# Altium PCB PCB2.PcbDoc
Units mil, origin at the board's own origin, x right, y up, seen from the top; angles counter-clockwise.
Board outline 1730 x 1050 mil, 2 copper layers (Top Layer, Bottom Layer); 18 components, 25 nets, 102 pads, 23 vias.
Unrouted connection lines stored in the file: 1.
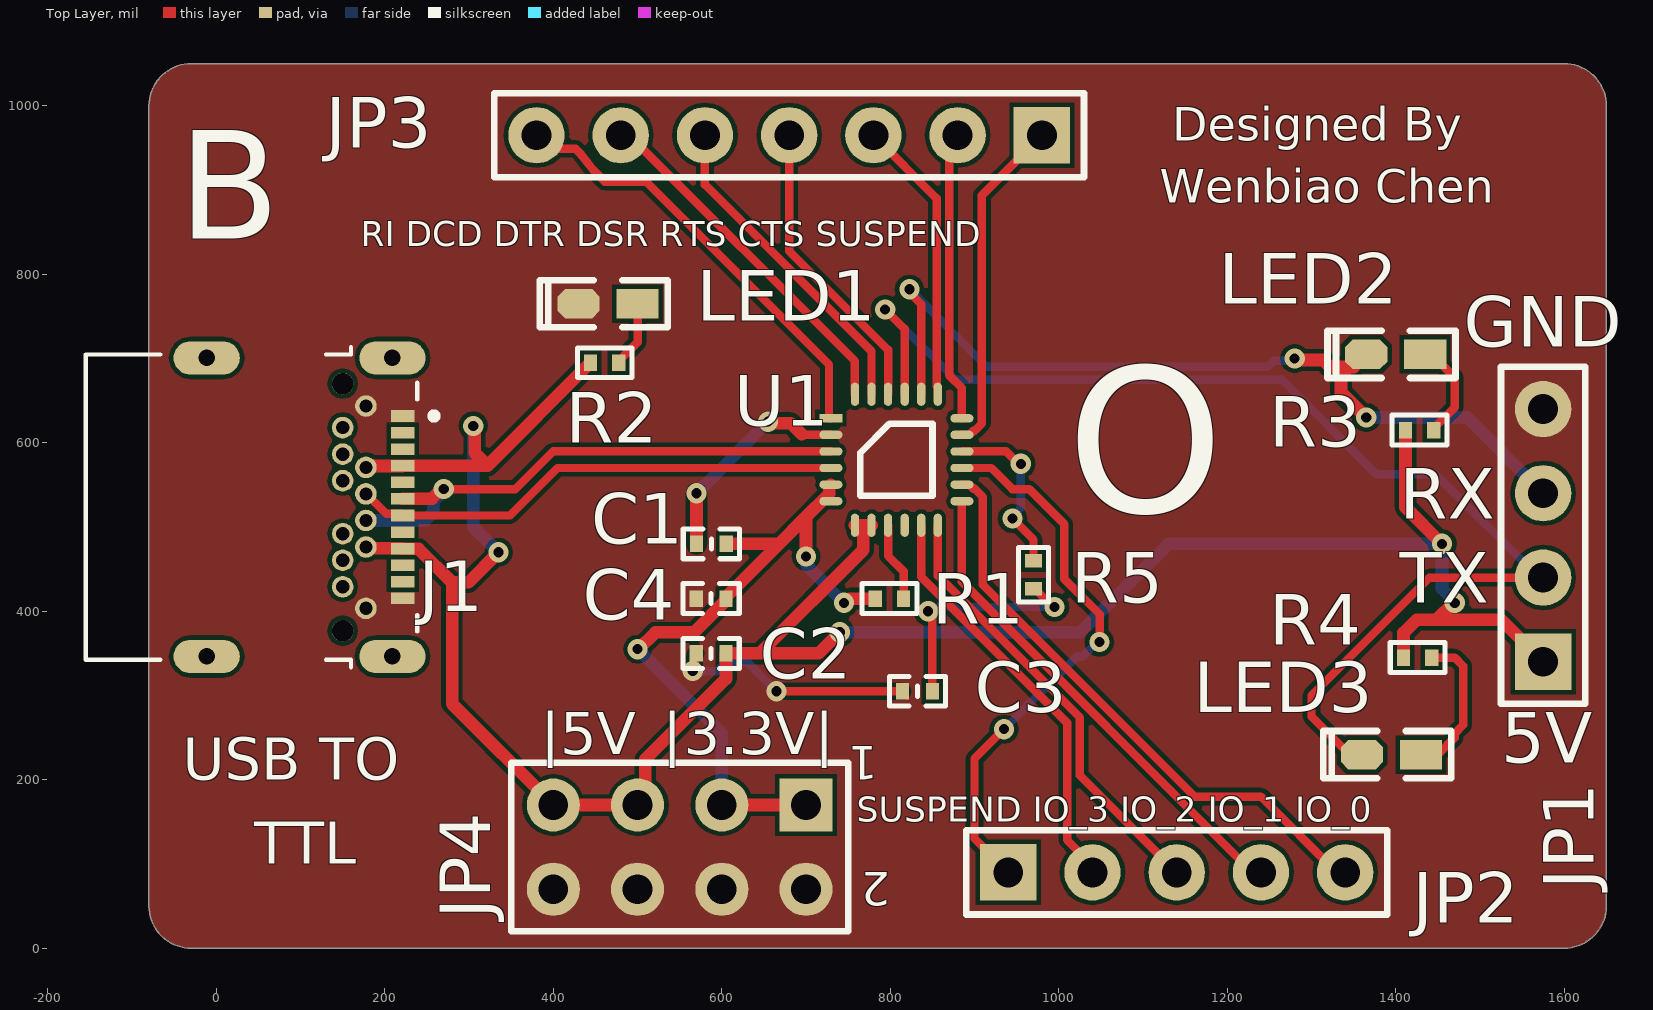
[diagram p0: Top Layer view]
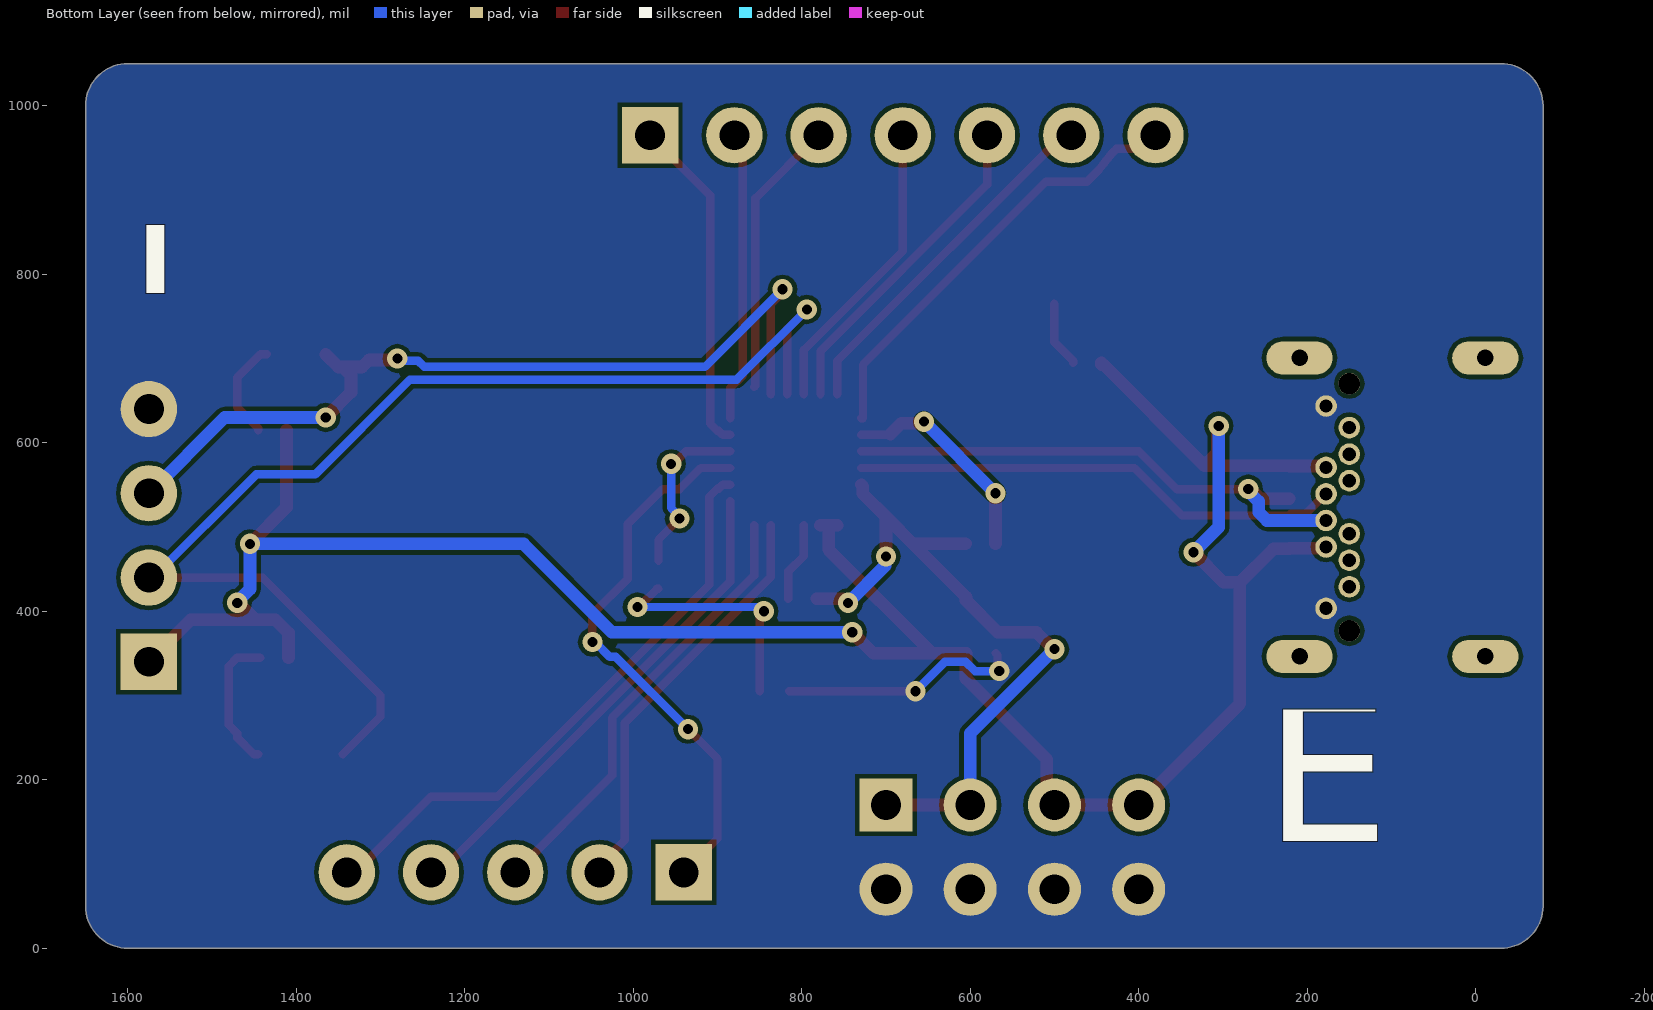
[diagram p1: Bottom Layer view, seen from below]

## Layer stack, top to bottom
Top Solder: solder mask 0.4, Solder Resist, Dk 3.5
Top Layer: signal copper 1.4
Dielectric 1: dielectric 12.6, FR-4, Dk 4.8
Bottom Layer: signal copper 1.4
Bottom Solder: solder mask 0.4, Solder Resist, Dk 3.5

## Board outline
-80,50 -80,1000 cw(c-30,1000) -30,1050 1600,1050 cw(c1600,1000) 1650,1000 1650,50 cw(c1600,50) 1600,0 -30,0 cw(c-30,50)

## Design rules (kind name [scope] priority, off if disabled: settings)
Clearance [All] p1: gap=5 ignorepadtopadclearanceinfootprint=TRUE
MinimumSolderMaskSliver [All] p1: minsoldermaskwidth=0
PolygonConnect [All] p1: connectstyle=Direct reliefconductorwidth=10 reliefentries=4 polygonreliefangle="90 Angle" airgapwidth=10
RoutingVias [All] p1: holewidth=28 width=50 viastyle="Through Hole" minholewidth=12 minwidth=24 maxholewidth=28 maxwidth=50
SilkToSilkClearance [All] p1: silktosilkclearance=0
SilkToSolderMaskClearance [IsPad] p1: minsilkscreentomaskgap=0 clearancetoexposedcopper=TRUE
SolderMaskExpansion [All] p1: expansion=4 istentingtop=FALSE
Width [All] p1: maxlimit=15 minlimit=10 preferedwidth=10
27 further rules are at their usual default settings.

## Components (designator, comment, footprint, x,y, rotation, side; value= is the part's Value field where it differs from the comment)
C1 "104" "C 0402_L" 587.71,480 r180 top
C2 "104" "C 0402_L" 587.28,350 r180 top
C3 "104" "C 0402_L" 832.29,305 r0 top
C4 "104" "C 0402_L" 587.28,415 r180 top
J1 "USB_Type-C" Type_C-UJ31-CH-G2-SMT-TR(Primary) 221.26,631.77 r270 top
JP1 "HDR-1X4" HDR2.54-LI-4P 1575,490 r90 top
JP2 "HDR-1X5" HDR2.54-LI-5P 1140,90 r0 top
JP3 "HDR-1X7" HDR2.54-LI-7P 680,965 r180 top
JP4 "Header 4X2" HDR2.54-LI-2x4P 550,120 r180 top
LED1 "红色" "LED 0603B" 465,765.26 r180 top
LED2 "红色" "LED 0603Y" 1400,705 r180 top
LED3 "红色" "LED 0603G" 1395,230 r180 top
R1 "1K" "R 0402_L" 800,415 r180 top
R2 "1K" "R 0402_L" 460,695 r0 top
R3 "1K" "R 0402_L" 1427.29,615 r0 top
R4 "1K" "R 0402_L" 1425,345 r0 top
R5 "1K" "R 0402_L" 970,444.25 r270 top
U1 "CP2104" CP2104 729.49,629.06 r0 top

## Footprints (in the part's own frame and the unit in brackets; to place one, negate y for a bottom-side part, rotate by r counter-clockwise, add the part's x,y. Pads: shape width x height; smd on the part's side, far side on the other; paste and mask are expansions set on the pad)
"C 0402_L" [mm] "无极性贴片电容         淘宝ID:黄晶宝石"
  rect 0.4x0.5 smd: 1(-0.45,0) 2(0.45,0)
  silkscreen extent -0.85,-0.45 0.85,0.45, body extent -0.5,-0.26 0.5,0.26, height 0.53
CP2104 [mm]
  rect 0.7x0.25 smd: 1(0,0)
  oval 0.7x0.25 smd: 2(0,-0.5) 3(0,-1) 4(0,-1.5) 5(0,-2) 6(0,-2.5) 13(3.95,-2.5) 14(3.95,-2) 15(3.95,-1.5) 16(3.95,-1) 17(3.95,-0.5) 18(3.95,0)
  oval 0.25x0.7 smd: 7(0.725,-3.225) 8(1.225,-3.225) 9(1.725,-3.225) 10(2.225,-3.225) 11(2.725,-3.225) 12(3.225,-3.225) 19(3.225,0.725) 20(2.725,0.725) 21(2.225,0.725) 22(1.725,0.725) 23(1.225,0.725) 24(0.725,0.725)
  silkscreen extent 0.88,-2.34 3.06,-0.16, body extent -0.05,-3.25 4.05,0.85, height 0.8
HDR2.54-LI-2x4P [mm] "双排排针，4x2脚 淘宝ID:黄晶宝石   店铺网址:https://shop463601444.taobao.com"
  rect 1.6x1.6 hole 0.9: 1(-3.81,-1.27)
  round 1.6 hole 0.9: 2(-3.81,1.27) 3(-1.27,-1.27) 4(-1.27,1.27) 5(1.27,-1.27) 6(1.27,1.27) 7(3.81,-1.27) 8(3.81,1.27)
  silkscreen extent -5.08,-2.54 5.08,2.54, body extent -5.08,-2.54 5.08,2.54, height 8.5
HDR2.54-LI-4P [mm] "排针，4脚"
  rect 1.7x1.7 hole 0.9: 1(-3.81,0)
  round 1.7 hole 0.9: 2(-1.27,0) 3(1.27,0) 4(3.81,0)
  silkscreen extent -5.08,-1.27 5.08,1.27, body extent -5.08,-1.27 5.08,1.27, height 8.5
HDR2.54-LI-5P [mm] "排针，5脚"
  rect 1.7x1.7 hole 0.9: 1(-5.08,0)
  round 1.7 hole 0.9: 2(-2.54,0) 3(0,0) 4(2.54,0) 5(5.08,0)
  silkscreen extent -6.35,-1.27 6.35,1.27, body extent -6.35,-1.27 6.35,1.27, height 8.5
HDR2.54-LI-7P [mm] "排针，8脚"
  rect 1.7x1.7 hole 0.9: 1(-7.62,0)
  round 1.7 hole 0.9: 2(-5.08,0) 3(-2.54,0) 4(0,0) 5(2.54,0) 6(5.08,0) 7(7.62,0)
  silkscreen extent -8.89,-1.27 8.89,1.27, body extent -8.89,-1.27 8.89,1.27, height 8.5
"LED 0603B" [mil] "蓝色0603LED                             淘宝ID:黄晶宝石"
  rect 50x35 smd: 1(-35,0.26)
  oct 50x35 smd: 2(35,0.26)
  silkscreen extent -71,-28 81,28, body extent -31,-16 32,16, height 24
"LED 0603G" [mil] "绿色0603LED                                   淘宝ID:黄晶宝石"
  rect 50x35 smd: 1(-35,0.26)
  oct 50x35 smd: 2(35,0.26)
  silkscreen extent -71,-28 81,28, body extent -31,-16 32,16, height 18
"LED 0603Y" [mil] "黄色0603LED                              淘宝ID:黄晶宝石"
  rect 50x35 smd: 1(-35,0)
  oct 50x35 smd: 2(35,0)
  silkscreen extent -71,-28 81,28, body extent -32,-16 31,16, height 18
"R 0402_L" [mm] "1/16W贴片电阻     淘宝ID:黄晶宝石"
  rect 0.4x0.5 smd: 1(-0.4,0) 2(0.45,0)
  silkscreen extent -0.8,-0.45 0.85,0.45, body extent -0.5,-0.25 0.5,0.25, height 0.3
Type_C-UJ31-CH-G2-SMT-TR(Primary) [mm]
  rect 0.35x0.7 smd: A1(0,0) A2(0.5,0) A3(1,0) A4(1.5,0) A5(2,0) A6(2.5,0) A7(3,0) A8(3.5,0) A9(4,0) A10(4.5,0) A11(5,0) A12(5.5,0)
  round 0.65 hole 0.4: B1(5.8,-1.11) B2(5.15,-1.81) B3(4.35,-1.81) B4(3.95,-1.11) B5(3.55,-1.81) B6(3.15,-1.11) B7(2.35,-1.11) B8(1.95,-1.81) B9(1.55,-1.11) B10(1.15,-1.81) B11(0.35,-1.81) B12(-0.3,-1.11)
  round 0.65 hole 0.65 unplated: None(-0.975,-1.81) None(6.475,-1.81)
  oval 1x2 hole 0.5: SH1(-1.75,-0.31) SH2(7.25,-0.31) SH3(-1.75,-5.91) SH4(7.25,-5.91)
  silkscreen extent -2.07,-9.56 7.57,1.04, body extent -2.06,-9.61 7.65,0.39, height 4.5

## Part data
C1 C2 C3 C4: library part C, "贴片电容", BOM名称=无极性贴片电容, 唯一出售店铺网址=https://shop463601444.taobao.com, 淘宝ID="封装库来自淘宝 ID：黄晶宝石", 联系售后，技术支持=https://shop463601444.taobao.com
JP1: library part "Header 4", "4P接插件", BOM名称=4P接插件, 学习资源=https://shop463601444.taobao.com, 版权归属="封装库来自淘宝 ID：黄晶宝石"
JP2: library part "Header 5", "5P接插件", BOM名称=5P接插件, 学习资源=https://shop463601444.taobao.com, 版权归属="封装库来自淘宝 ID：黄晶宝石"
JP3: library part "Header 7", "7P接插件", BOM名称=7P接插件, 学习资源=https://shop463601444.taobao.com, 版权归属="封装库来自淘宝 ID：黄晶宝石"
JP4: "4*2P接插件", BOM名称=4*2P接插件, 学习资源=https://shop463601444.taobao.com, 版权归属="封装库来自淘宝 ID：黄晶宝石"
LED1 LED2 LED3: library part LED-SMD, "贴片LED", BOM名称=贴片LED, 学习资源=https://shop463601444.taobao.com, 版权归属="封装库来自淘宝 ID：黄晶宝石"
R1 R2 R3 R4 R5: library part R, "贴片电阻", BOM名称=贴片电阻, 封装库来自淘宝卖家 ID：黄晶宝石=其他店铺购入均为盗版，不享受售后技术支持服务，请立即申请退款, 版权归属="来自淘宝 ID：黄晶宝石", 联系售后=https://shop463601444.taobao.com

## Via types
v1: diameter 24, hole 12, Top Layer to Bottom Layer, 23 vias

## Nets (pads, with @x,y where several pads share a name; then routed paths per layer and width w, separated by ;. In a path a pad name is that pad's centre, name@x,y a point inside that pad or via, vN(x,y) a via of type N, cw(c..) or ccw(c..) an arc to the next point about the centre after c; other vN are vias at no path point)
3.3V: C1.1 C4.1 JP4.1 JP4.3 R1.2 U1.5 U1.6 | length 865.6
  Top Layer w10: U1.5@729.41,550.24 U1.5
  Top Layer w15: v1(500,355) 501.35,355 521.35,375 566.97,375 605,413.03 C4.1 605,416.97 668.03,480 ; JP4.3 JP4.1 ; C1.1 668.03,480 ; v1(700,465) 700,507.73 697.88,509.85 ; U1.5@729.41,550.24 727.74,548.56 727.74,539.7 697.88,509.85 ; v1(745,410) 746.35,410 751.36,415 R1.2 ; 668.03,480 697.88,509.85
  Bottom Layer w15: v1(500,355) 600,255 JP4.3 ; v1(700,465) 700.96,464.04 700.96,454.04 v1(745,410)
5V: C2.1 J1.A4 J1.A9 J1.B4 J1.B9 JP1.1 JP4.5 JP4.7 R2.1 R3.1 R4.1 U1.7 U1.8 | length 2970.7
  Top Layer w15: J1.B4 179.23,474.59 220.96,474.59 J1.A9 221.56,474 240.22,474 280,434.21 ; J1.B9 179.23,572.42 220.96,572.42 J1.A4 321.97,572.72 ; v1(305,620) 306.72,618.28 306.72,587.96 321.97,572.72 ; v1(335,470) 299.21,434.21 280,434.21 ; R2.1 444.25,693.03 443.87,692.65 441.91,692.65 321.97,572.72 ; v1(740,375) 715,350 645,350 ; U1.7 767.87,502.09 ; U1.8 767.87,502.09 ; R4.1 1409.25,374.25 1425,390 1448.65,390 ; R3.1 1411.54,523.46 v1(1455,480) ; v1(1470,410) 1468.65,410 1448.65,390 ; JP1.1 1525,390 1448.65,390 ; 280,434.21 280,290 JP4.7 JP4.5 509,179 509,224 605,320 C2.1 645,350 ; 645,350 767.87,472.87 767.87,502.09
  Bottom Layer w15: v1(305,620) 305,500 v1(335,470) ; v1(740,375) 1025.25,375 1130.25,480 v1(1455,480) 1455,426.35 1470,411.35 v1(1470,410)
CTS: JP3.2 U1.18 | length 346.3
  Top Layer w10: JP3.2 870,955 870,680 885,665 U1.18
DCD: JP3.6 U1.24 | length 428.4
  Top Layer w10: JP3.6 490,965 758.03,696.97 U1.24
DSR: JP3.4 U1.22 | length 356
  Top Layer w10: JP3.4 680,827.57 797.4,710.17 U1.22
DTR: JP3.5 U1.23 | length 389.3
  Top Layer w10: JP3.5 580,906.36 777.72,708.64 U1.23
GND: C1.2 C2.2 C3.1 C4.2 J1.A1 J1.A12 J1.B1 J1.B12 JP1.4 JP4.2 JP4.4 JP4.6 JP4.8 LED1.2 U1.2 | length 551.9
  Top Layer w10: v1(565.58,328.9) 567.58,330.9 567.58,348.01 C2.2 ; v1(665,305) C3.1 ; 695,610 695.63,609.37 U1.2
  Top Layer w15: C1.2 v1(570,540) ; v1(655,625) 656.72,623.28 681.72,623.28 695,610
  Bottom Layer w10: v1(565.58,328.9) 594.31,328.9 605.23,339.82 630.18,339.82 v1(665,305)
  Bottom Layer w15: v1(570,540) v1(655,625)
GPIO_0: JP2.5 U1.14 | length 706.8
  Top Layer w10: U1.14 893.7,550.32 898.46,545.55 900.04,545.55 910,535.59 910,431.21 1161.21,180 1240,180 1330,90 JP2.5
GPIO_1: JP2.4 U1.13 | length 593.5
  Top Layer w10: U1.13 885,435 1230,90 JP2.4
GPIO_2: JP2.3 U1.12 | length 529.5
  Top Layer w10: U1.12 856.46,442.33 1025,273.79 1025,205 JP2.3
GPIO_3: JP2.2 U1.11 | length 496.3
  Top Layer w10: U1.11 836.77,440.8 1010,267.57 1010,128.54 1040,98.54 JP2.2
NetC3_2: C3.2 R5.2 | length 283.1
  Top Layer w10: v1(845,400) 845,397.29 850,392.29 C3.2 ; R5.2 971.97,426.54 993.5,405 v1(995,405)
  Bottom Layer w10: v1(845,400) 847.71,400 852.71,405 v1(995,405)
NetJ1_A6: J1.A6 J1.B6 U1.3 | length 648.3
  Top Layer w10: v1(270,545) 355,545 399.69,589.68 U1.3
  Top Layer w15: J1.A6 221.56,533.64 256.21,533.64 267.56,545 v1(270,545)
  Bottom Layer w15: J1.B6 247.85,507.76 257.67,517.58 257.67,530.24 270,542.56 v1(270,545)
NetJ1_A7: J1.A7 J1.B7 U1.4 | length 585.9
  Top Layer w10: J1.B7 178.3,539.25 202,515.55 219.37,515.55 J1.A7 348.66,513.66 405,570 U1.4
NetLED1_1: LED1.1 R2.2 | length 79.2
  Top Layer w10: R2.2 477.71,696.97 500,719.25 LED1.1
NetLED2_1: LED2.1 R3.2 | length 119.2
  Top Layer w10: LED2.1 1442.5,705 1470,677.5 1470,641.97 1445,616.97 R3.2
NetLED3_1: LED3.1 R4.2 | length 163.9
  Top Layer w10: R4.2 1470,345 1480,335 1480,265 1470,255 1470,250 1450,230 LED3.1@1445,230
NetR1_1: R1.1 U1.9 | length 94.7
  Top Layer w10: U1.9 797.4,465.79 815.75,447.44 R1.1
NetR5_1: R5.1 U1.16 | length 205.6
  Top Layer w10: U1.16 937.61,589.68 952.29,575 v1(955,575) ; v1(945,510) 970,485 R5.1
  Bottom Layer w10: v1(945,510) 945,512.71 955,522.71 v1(955,575)
RI: JP3.7 U1.1 | length 527.3
  Top Layer w10: JP3.7 393.16,951.84 396.09,948.91 426.43,948.91 429.36,945.98 431.24,944.1 431.45,943.89 431.66,943.68 437.5,936.27 447.36,923.76 448.15,922.88 461.03,910 510,910 727.3,692.7 727.3,629.13 727.38,629.06 U1.1
RTS: JP3.3 U1.19 | length 330.3
  Top Layer w10: JP3.3 855,890 855,667.76 U1.19@856.38,666.38
RXD: JP1.3 LED2.2 U1.20 | length 1049.3
  Top Layer w10: v1(822.74,782.26) 822.74,778.47 836.69,764.52 836.69,657.68 U1.20
  Top Layer w15: v1(1280,700) 1281.72,698.28 1313.72,698.28 1322,690 1345,690 ; v1(1365,630) 1335,660 1335,680 1345,690 ; LED2.2 1350,690 1345,690
  Bottom Layer w10: v1(822.74,782.26) 915,690 1248,690 1255.32,697.32 1277.32,697.32 v1(1280,700)
  Bottom Layer w15: v1(1365,630) 1485,630 JP1.3
SUSPEND: JP3.1 U1.17 | length 401
  Top Layer w10: U1.17 893.7,609.37 898.46,614.13 900.04,614.13 908.78,622.87 908.78,893.78 JP3.1
SUSPEND_1: JP2.1 U1.15 | length 664
  Top Layer w10: U1.15 920,570 945,545 965,545 1006.54,503.46 1006.54,438.46 1048.75,396.25 1048.75,363.85 v1(1048.33,363.43) ; v1(935,260) 900,225 900,130 JP2.1
  Bottom Layer w10: v1(935,260) 1020.75,345.75 1027.83,345.75 1045.5,363.43 v1(1048.33,363.43)
TXD: JP1.2 LED3.2 U1.21 | length 1444.8
  Top Layer w10: v1(793.92,758.28) 817.09,735.11 U1.21 ; LED3.2@1345,230 1300,275 1300,300 1413.33,413.33 1440,440 JP1.2
  Bottom Layer w10: v1(793.92,758.28) 877.19,675 1265,675 1377.5,562.5 1447.5,562.5 1570,440 JP1.2
pads on no net: J1.A2 J1.A3 J1.A5 J1.A8 J1.A10 J1.A11 J1.B2 J1.B3 J1.B5 J1.B8 J1.B10 J1.B11 J1.None J1.SH1 J1.SH2 J1.SH3 J1.SH4 U1.10

## Polygon pours and split planes (outlines as drawn)
GND on Bottom Layer "GND_L02_P002" (solid, remove dead copper, pour order 2): -80,50 -80,1000 cw(c-30,1000) -30,1050 1600,1050 cw(c1600,1000) 1650,1000 1650,50 cw(c1600,50) 1600,0 -30,0 cw(c-30,50)
GND on Top Layer "GND_L01_P000" (solid, remove dead copper, pour order 0): -80,50 -80,1000 cw(c-30,1000) -30,1050 1600,1050 cw(c1600,1000) 1650,1000 1650,50 cw(c1600,50) 1600,0 -30,0 cw(c-30,50)

## Silkscreen, mask and mechanical layers (free items; w line width, h text height)
Top Overlay:
  text "Designed By" at 1135,958.33 h40
  text "Wenbiao Chen" at 1120,885 h40
  text "RI DCD DTR DSR RTS CTS SUSPEND" at 171.35,833.34 h30
  text "B" at -45,800 h220
  text "GND" at 1481,714 h60
  text "RX" at 1405,510 h60
  text "O" at 1009.57,433.81 h440
  text "TX" at 1405,410 h60
  text "|5V" at 385,230 h50
  text "|" at 530,230 h50
  text "3.3V|" at 555,230 h50
  text "5V" at 1525,220 h60
  text "USB TO" at -40,200 h50
  text "SUSPEND IO_3 IO_2 IO_1 IO_0" at 760,150 h30
  text "TTL" at 45,100 h50
Bottom Overlay:
  text "i" at 1600,663.53 h600
  text "TECH OTAKUS SAVE THE WORLD" at 1340,340 h80
  text "E" at 251.56,51.17 h400
Mechanical 1:
  lines w10: -80,50 ccw(c-30,50) -30,0 1600,0 ccw(c1600,50) 1650,50 1650,1000 ccw(c1600,1000) 1600,1050 -30,1050 ccw(c-30,1000) -80,1000 -80,725 -80,50

## Text inside footprints (layer, text, board x,y; h text height)
JP4: Top Overlay "1" at 785,240 h40 r180; Top Overlay "2" at 800,90 h40 r180